# Altium PCB LedRond.PcbDoc
Units mil, origin at the board's own origin, x right, y up, seen from the top; angles counter-clockwise.
Board outline 1504.33 x 1504.33 mil, 2 copper layers (Top Layer, Bottom Layer); 8 components, 81 nets, 19 pads, 0 vias.
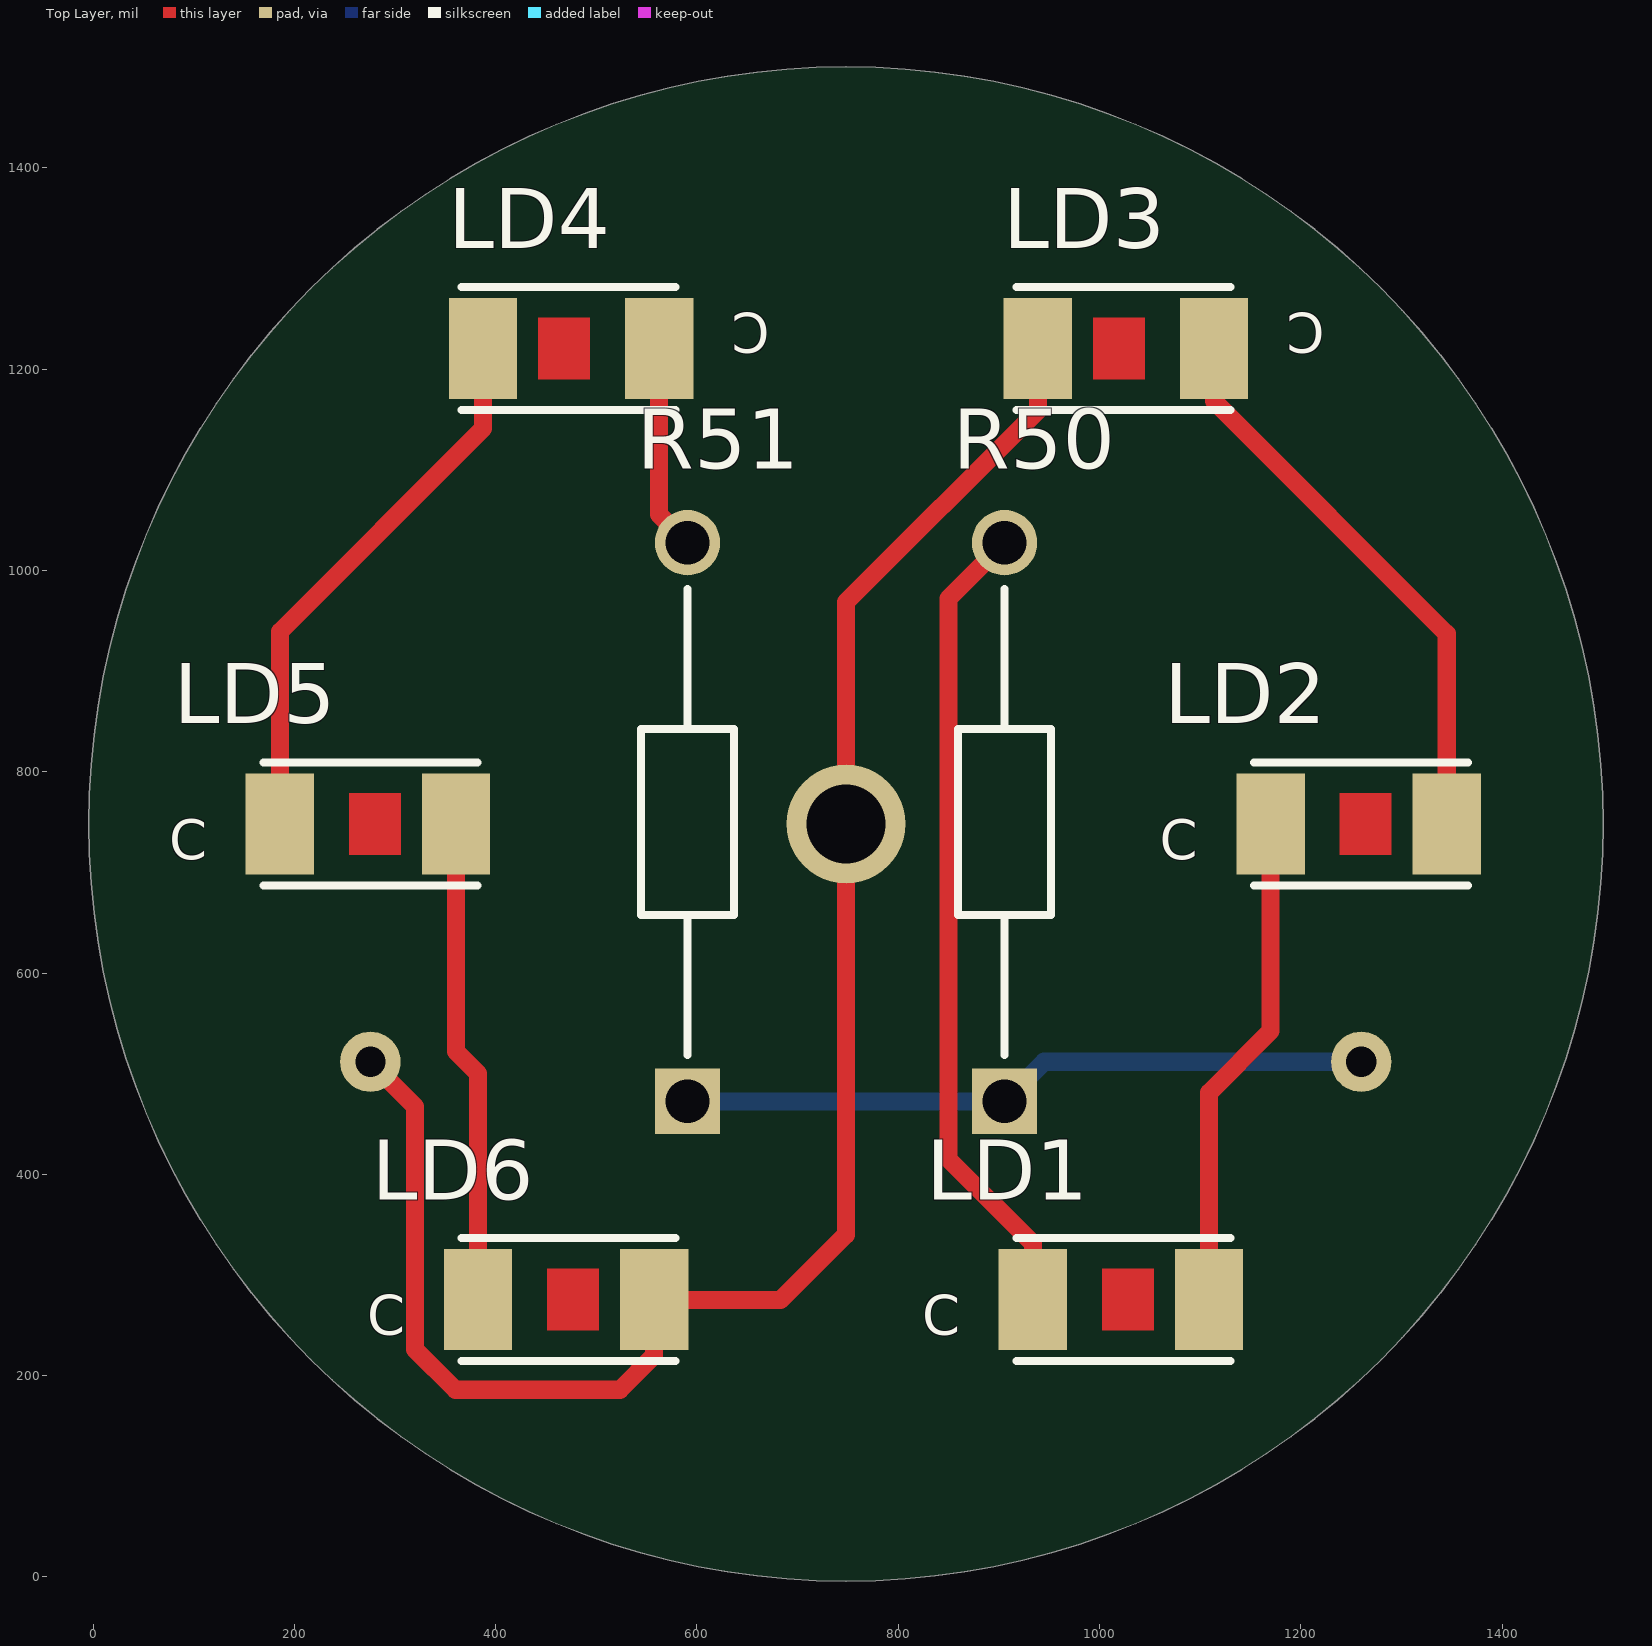
[diagram p0: Top Layer view]
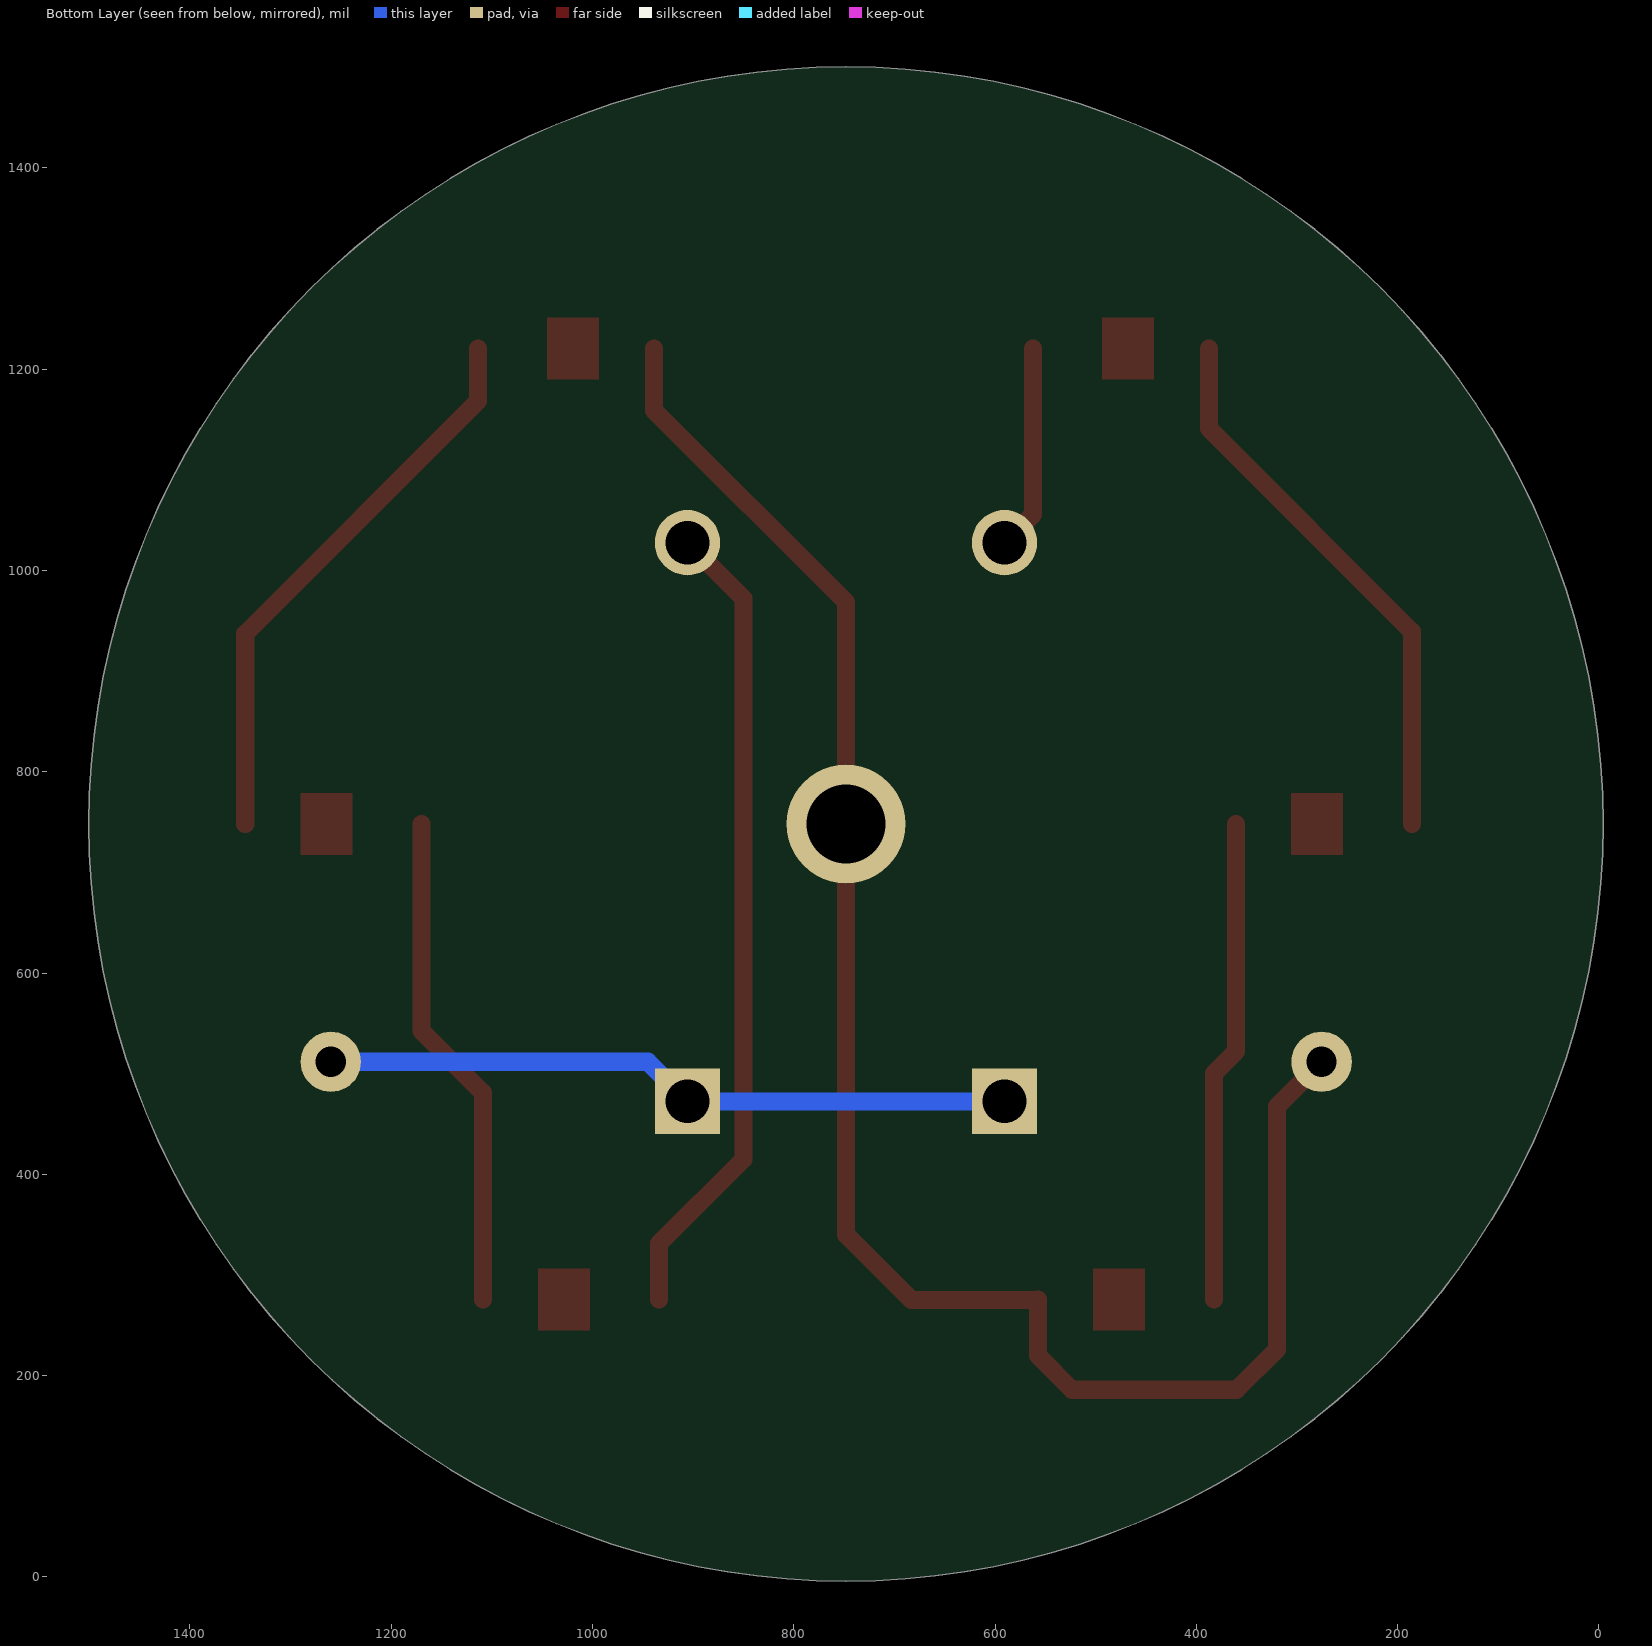
[diagram p1: Bottom Layer view, seen from below]
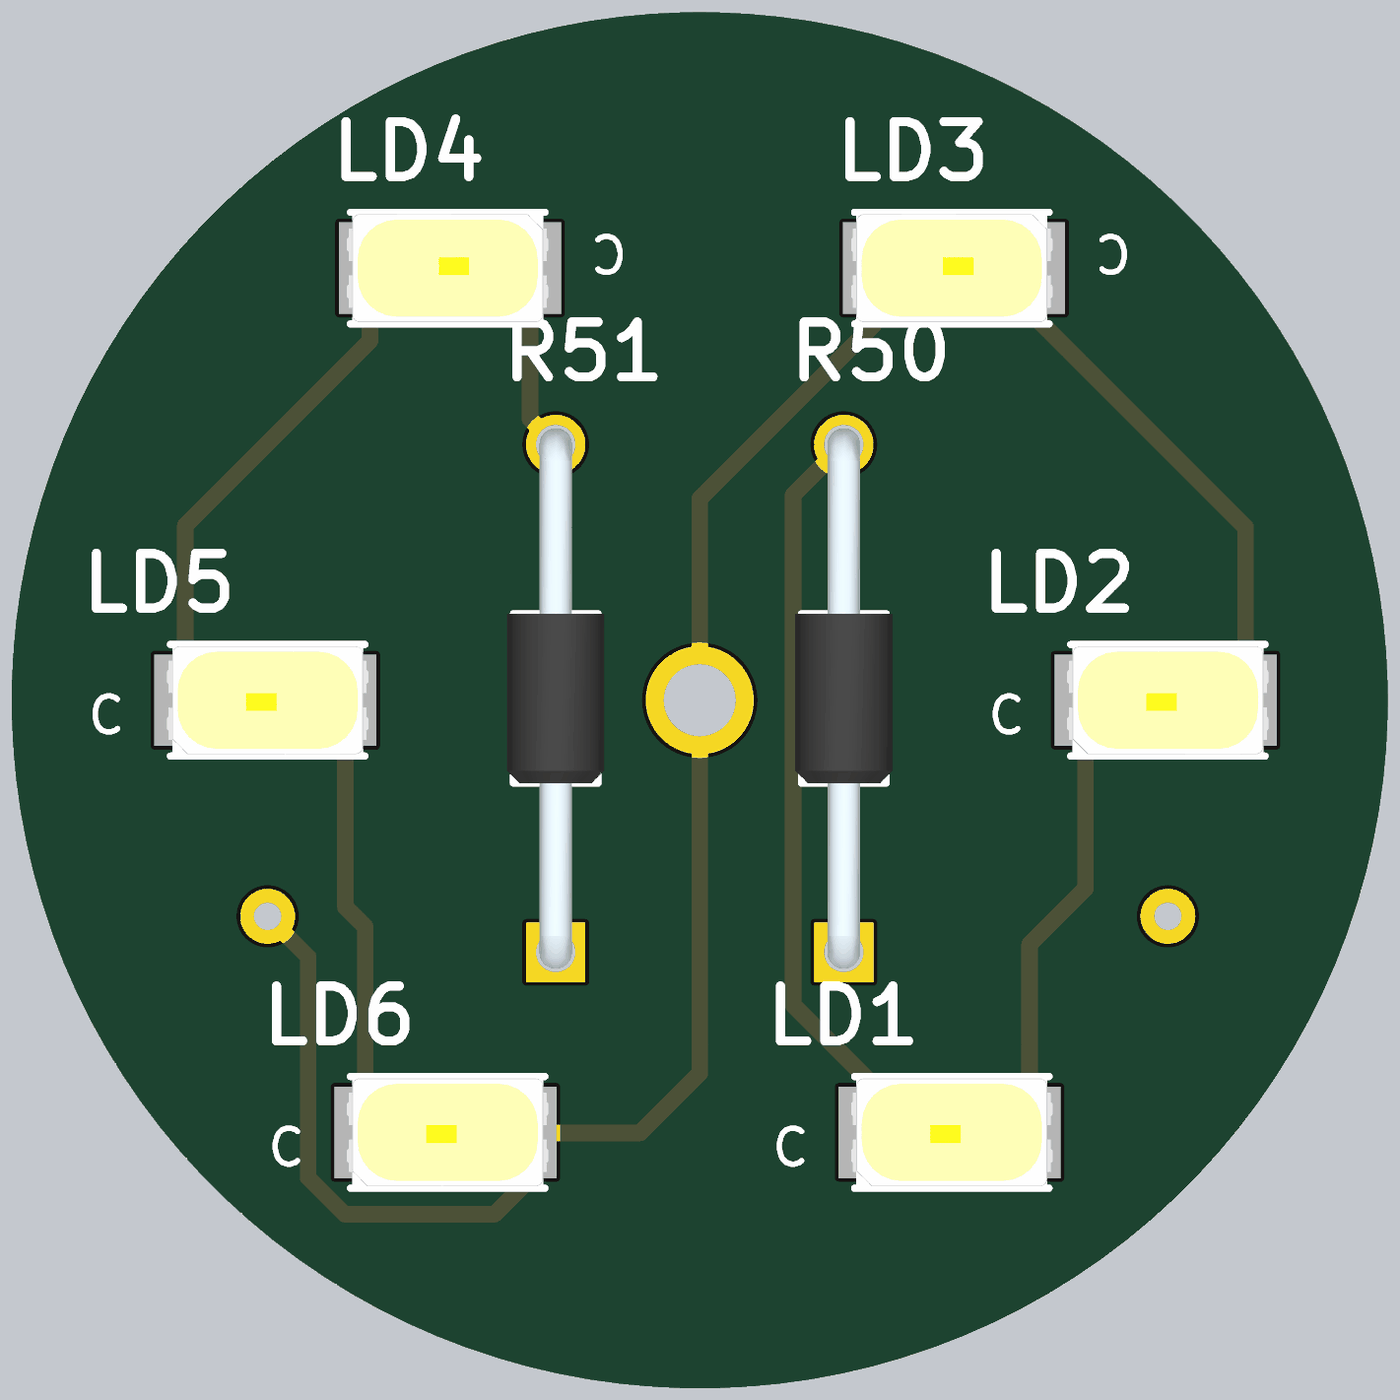
[diagram p2: 3D render of the assembled board from above, using the file's embedded part models]

## Layer stack, top to bottom
Top Solder: solder mask 0.4, Solder Resist, Dk 3.5
Top Layer: signal copper 1.4
Dielectric 1: dielectric 12.6, FR-4, Dk 4.8
Bottom Layer: signal copper 1.4
Bottom Solder: solder mask 0.4, Solder Resist, Dk 3.5

## Board outline
748.03,-4.13 cw(c748.03,748.03) -4.13,748.03 cw(c748.03,748.03) 748.03,1500.2 cw(c748.03,748.03) 1500.2,748.03 cw(c748.03,748.03)

## Design rules (kind name [scope] priority, off if disabled: settings)
Clearance [All] p1: gap=10 ignorepadtopadclearanceinfootprint=FALSE except(0: Arc-Hole Track-Hole SMDPad-Hole THPad-Hole Via-Hole Fill-Hole Poly-Hole Region-Hole Text-Hole)
PolygonConnect [All] p1: connectstyle=Relief reliefconductorwidth=10 reliefentries=4 polygonreliefangle="90 Angle" airgapwidth=10
RoutingVias [All] p1: holewidth=28 width=50 viastyle="Through Hole" minholewidth=28 minwidth=50 maxholewidth=28 maxwidth=50
SolderMaskExpansion [All] p1: expansion=4 istentingtop=FALSE
Width [All] p1: maxlimit=25 minlimit=10 preferedwidth=18 minimp=50.000000 maximp=50.000000 favimp=50.000000
30 further rules are at their usual default settings.

## Components (designator, comment, footprint, x,y, rotation, side; value= is the part's Value field where it differs from the comment)
LD1 "Cool White, 2.8V, 120°" WL-SWTP_5630_L5.6W3H0.6 1023.62,275.59 r0 top
LD2 "Cool White, 2.8V, 120°" WL-SWTP_5630_L5.6W3H0.6 1259.84,748.03 r0 top
LD3 "Cool White, 2.8V, 120°" WL-SWTP_5630_L5.6W3H0.6 1023.62,1220.47 r180 top
LD4 "Cool White, 2.8V, 120°" WL-SWTP_5630_L5.6W3H0.6 472.44,1220.47 r180 top
LD5 "Cool White, 2.8V, 120°" WL-SWTP_5630_L5.6W3H0.6 275.59,748.03 r0 top
LD6 "Cool White, 2.8V, 120°" WL-SWTP_5630_L5.6W3H0.6 472.44,275.59 r0 top
R50 "10 Ohm" "Weerstand LEDS" 905.51,472.44 r90 top
R51 "10 Ohm" "Weerstand LEDS" 590.55,472.44 r90 top

## Footprints (in the part's own frame and the unit in brackets; to place one, negate y for a bottom-side part, rotate by r counter-clockwise, add the part's x,y. Pads: shape width x height; smd on the part's side, far side on the other; paste and mask are expansions set on the pad)
"Weerstand LEDS" [mm]
  rect 1.65x1.65 hole 1.1: 1(0,0)
  round 1.65 hole 1.1: 2(14.1,0)
  silkscreen extent 1.17,-1.18 12.93,1.17, body extent -0.45,-1.35 14.55,1.35, height 2.69
WL-SWTP_5630_L5.6W3H0.6 [mil] "SMD White Top view PLCC, body 5.6x3mm"
  rect 68x100 smd: 1(85,0) 2(-90,0)
  Top Layer region: -21.22,-30.51 -21.22,30.51 30,30.51 30,-30.51
  silkscreen extent -106,-61 106,61, body extent -110,-59 110,59, height 24

## Part data
LD1 LD2 LD3 LD4 LD5 LD6: library part 158563260A, "WL-SWTP SMT White Top view PLCC, size 5630, Cool White, 2.8V, 120°", Color Rendering Index=85, Correlated Color Temperature=6000K, Emitting Color="Cool White", Forward Voltage=2.8V, Manufacturer="Wurth Elektronik", Operating Temperature max.=85C, Operating Temperature min.=-40C, Chip Technology=InGaN, ComponentLink1Description="Manufacturer Link", ComponentLink1URL=http://www.we-online.de, ComponentLink2Description=Datasheet, ComponentLink2URL=https://www.we-online.com/catalog/datasheet/158563260A.pdf, Height=0.6mm, Length=5.6mm, Luminous Flux=35lm, Manufacturer Part Number=158563260A, Mounting Technology=SMT, Packaging="Tape and Reel", Size=5630, Viewing Angle=120°, Width=3mm
R50 R51: library part EP5WS10RJ, "Resistor LED", Manufacturer_Name="TE Connectivity", Datasheet Link=https://www.te.com/commerce/DocumentDelivery/DDEController?Action=showdoc&DocId=Data+Sheet%7F9-1773463-6%7FA%7Fpdf%7FEnglish%7FENG_DS_9-1773463-6_A.pdf%7F2176083-1, Manufacturer_Part_Number=EP5WS10RJ

## Free pads (board coordinates)
  round 118.11 hole 78.74: 22(748.03,748.03)
  round 60 hole 30: 23(1259.84,511.81) 24(275.59,511.81)

## Nets (pads, with @x,y where several pads share a name; then routed paths per layer and width w, separated by ;. In a path a pad name is that pad's centre, name@x,y a point inside that pad or via, vN(x,y) a via of type N, cw(c..) or ccw(c..) an arc to the next point about the centre after c; other vN are vias at no path point)
+5: pad.23 R50.1 R51.1 | length 685.6
  Bottom Layer w18: R51.1 R50.1 944.88,511.81 pad.23
GND: LD3.1 LD6.1 pad.22 pad.24 | length 1804.8
  Top Layer w18: pad.24 320,467.4 320,226 360,186 523.44,186 557.44,220 LD6.1@557.44,275 ; LD6.1 LD6.1@557.44,275 ; LD3.1 938.62,1159 748.03,968.41 pad.22 748.03,340.03 683,275 LD6.1@557.44,275
NetBR1_1: 
NetBR1_2: 
NetBR1_3: 
NetBR2_2: 
NetC7_2: 
NetC11_2: 
NetC13_2: 
NetC14_1: 
NetC14_2: 
NetC22_2: 
NetC23_2: 
NetC24_2: 
NetDS1_1: 
NetDS1_2: 
NetDS1_4: 
NetDS1_5: 
NetDS1_6: 
NetDS1_7: 
NetDS1_8: 
NetDS1_9: 
NetDS1_10: 
NetDS2_8: 
NetDS3_8: 
NetDS4_8: 
NetIC1_17: 
NetIC1_18: 
NetIC2_1: 
NetIC2_2: 
NetIC2_6: 
NetIC2_7: 
NetIC3_1: 
NetIC3_2: 
NetIC3_7: 
NetIC3_8: 
NetIC3_12: 
NetIC3_13: 
NetIC3_14: 
NetIC3_15: 
NetIC3_16: 
NetIC3_19: 
NetIC3_20: 
NetIC3_21: 
NetIC3_22: 
NetIC3_23: 
NetIC3_24: 
NetIC3_27: 
NetIC3_28: 
NetIC3_30: 
NetIC3_33: 
NetIC3_34: 
NetIC3_35: 
NetIC3_36: 
NetIC3_37: 
NetIC3_38: 
NetIC3_39: 
NetIC3_40: 
NetK1_1: 
NetK2_2: 
NetK3_2: 
NetK8_1: 
NetK8_2: 
NetL2_4: 
NetLD1_1: LD1.1 LD2.2 | length 497.8
  Top Layer w18: LD1.1 1108.62,481 1169.84,542.22 LD2.2
NetLD1_2: LD1.2 R50.2 | length 809.6
  Top Layer w18: R50.2 850,972.05 850,415 933.62,331.38 LD1.2
NetLD2_1: LD2.1 LD3.2 | length 568.2
  Top Layer w18: LD3.2 1113.62,1168.22 1344.84,937 LD2.1
NetLD4_1: LD4.1 LD5.2 | length 556
  Top Layer w18: LD5.2 185.59,939 387.44,1140.85 LD4.1
NetLD4_2: LD4.2 R51.2 | length 204.6
  Top Layer w18: LD4.2 562.44,1055.67 R51.2
NetLD5_1: LD5.1 LD6.2 | length 481.5
  Top Layer w18: LD5.1 360.59,521.85 382.44,500 LD6.2
NetR7_1: 
NetR11_1: 
NetR17_1: 
NetR18_1: 
NetR18_2: 
RegT4-MainR19: 
VerR5-mainIO9: 
VerR14-mainIO10: 
Vin: 
VoeR6R3-mainIO11: 
VoeRE1mainT1: 

## Silkscreen, mask and mechanical layers (free items; w line width, h text height)
Mechanical 1:
  circle w10: c748.03,748.03 r752.16
  text "+" at 1353.58,477.44 h60
  text "-" at 145,475.01 h60

## Text inside footprints (layer, text, board x,y; h text height)
LD1: Top Overlay "C" at 823.62,240.59 h39.37
LD2: Top Overlay "C" at 1059.84,713.03 h39.37
LD3: Top Overlay "C" at 1223.62,1255.47 h39.37 r180
LD4: Top Overlay "C" at 672.44,1255.47 h39.37 r180
LD5: Top Overlay "C" at 75.59,713.03 h39.37
LD6: Top Overlay "C" at 272.44,240.59 h39.37